# Altium PCB short_circuit_protection.PcbDoc
Units mm, origin at the board's own origin, x right, y up, seen from the top; angles counter-clockwise.
Board outline 77.72 x 84.84 mm, 2 copper layers (Top Layer, Bottom Layer); 11 components, 9 nets, 33 pads, 0 vias.
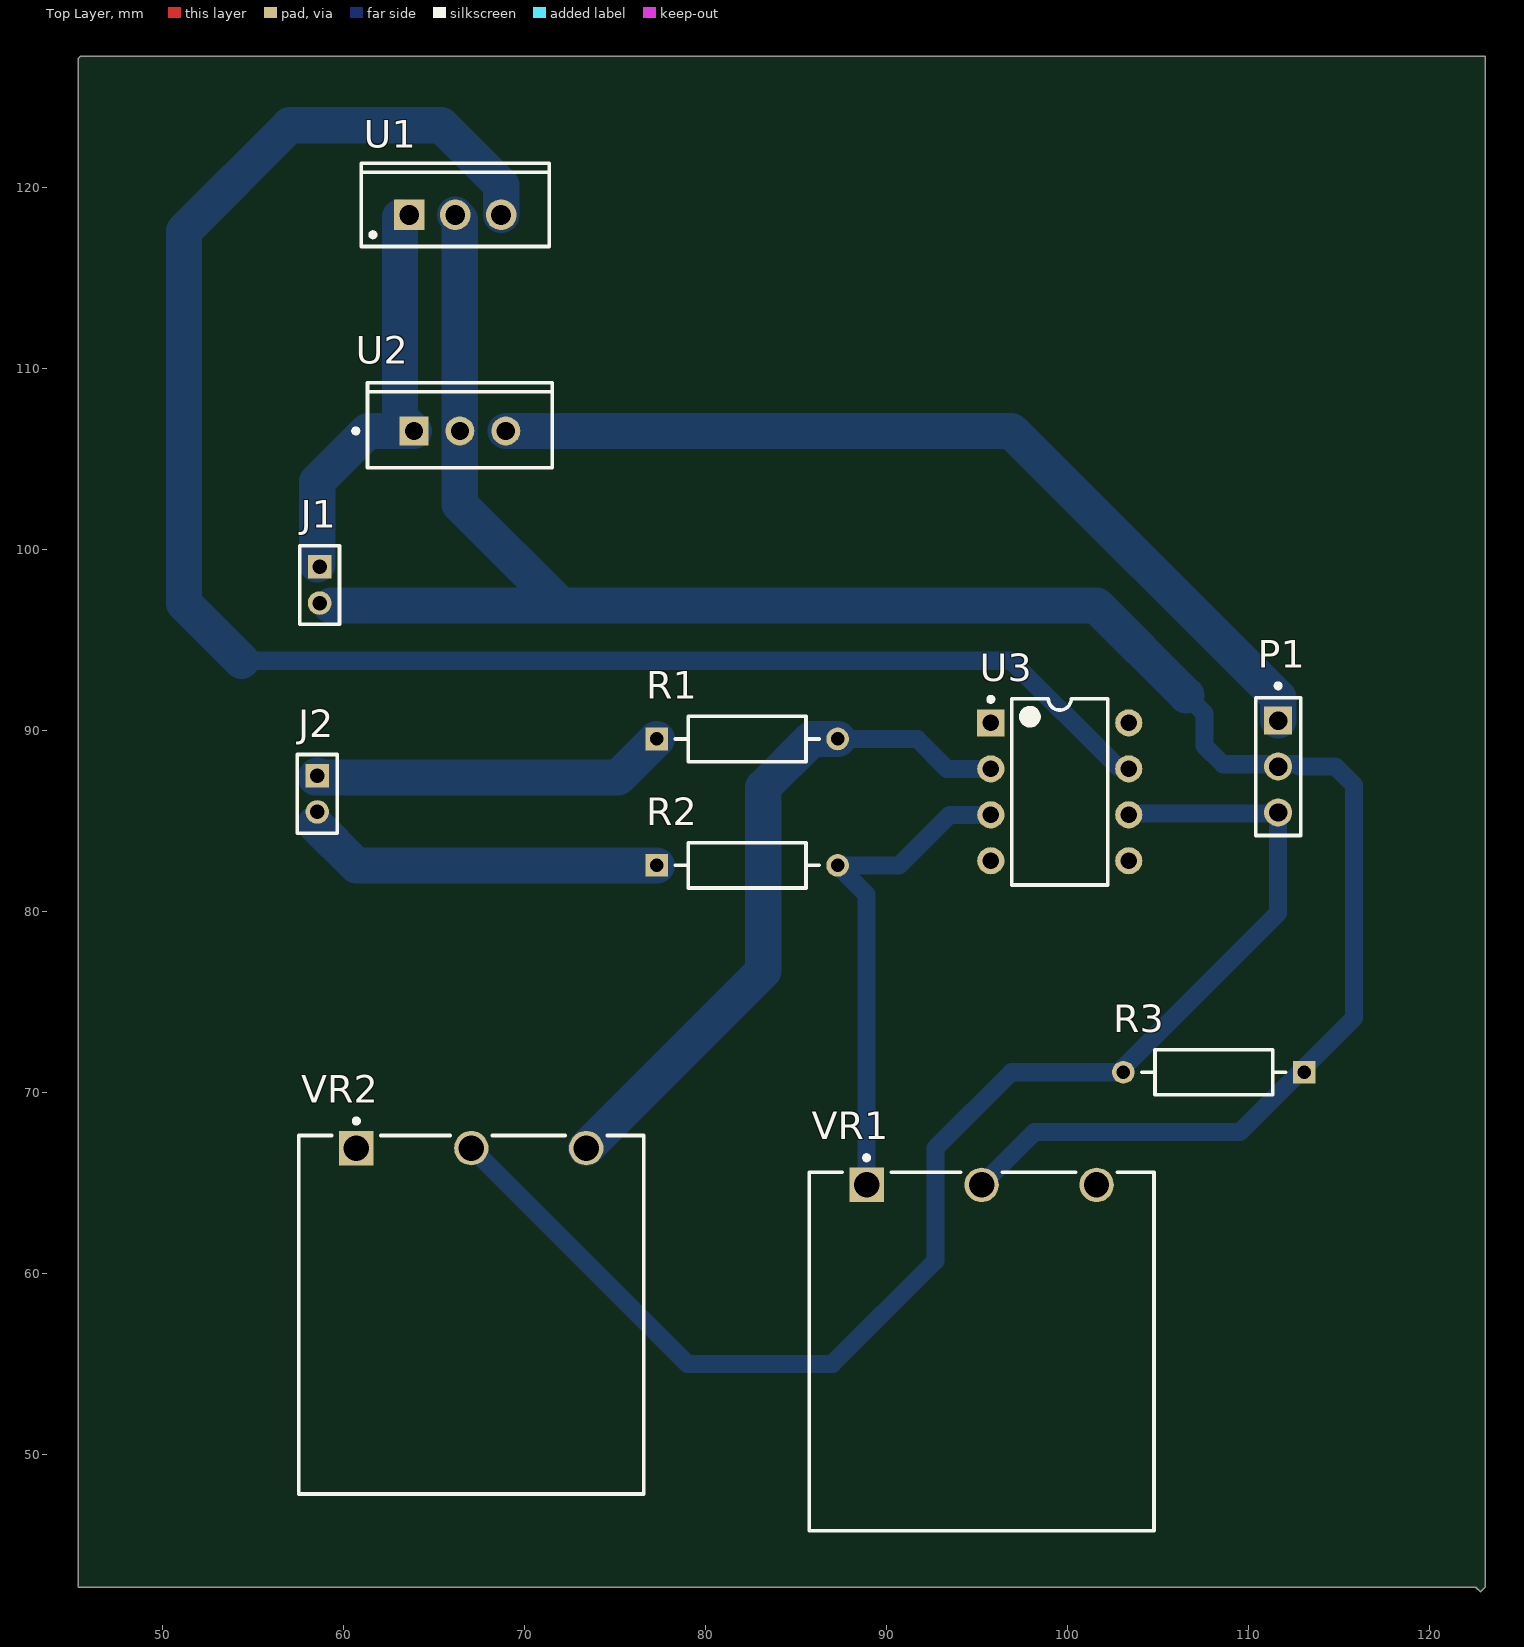
[diagram p0: Top Layer view]
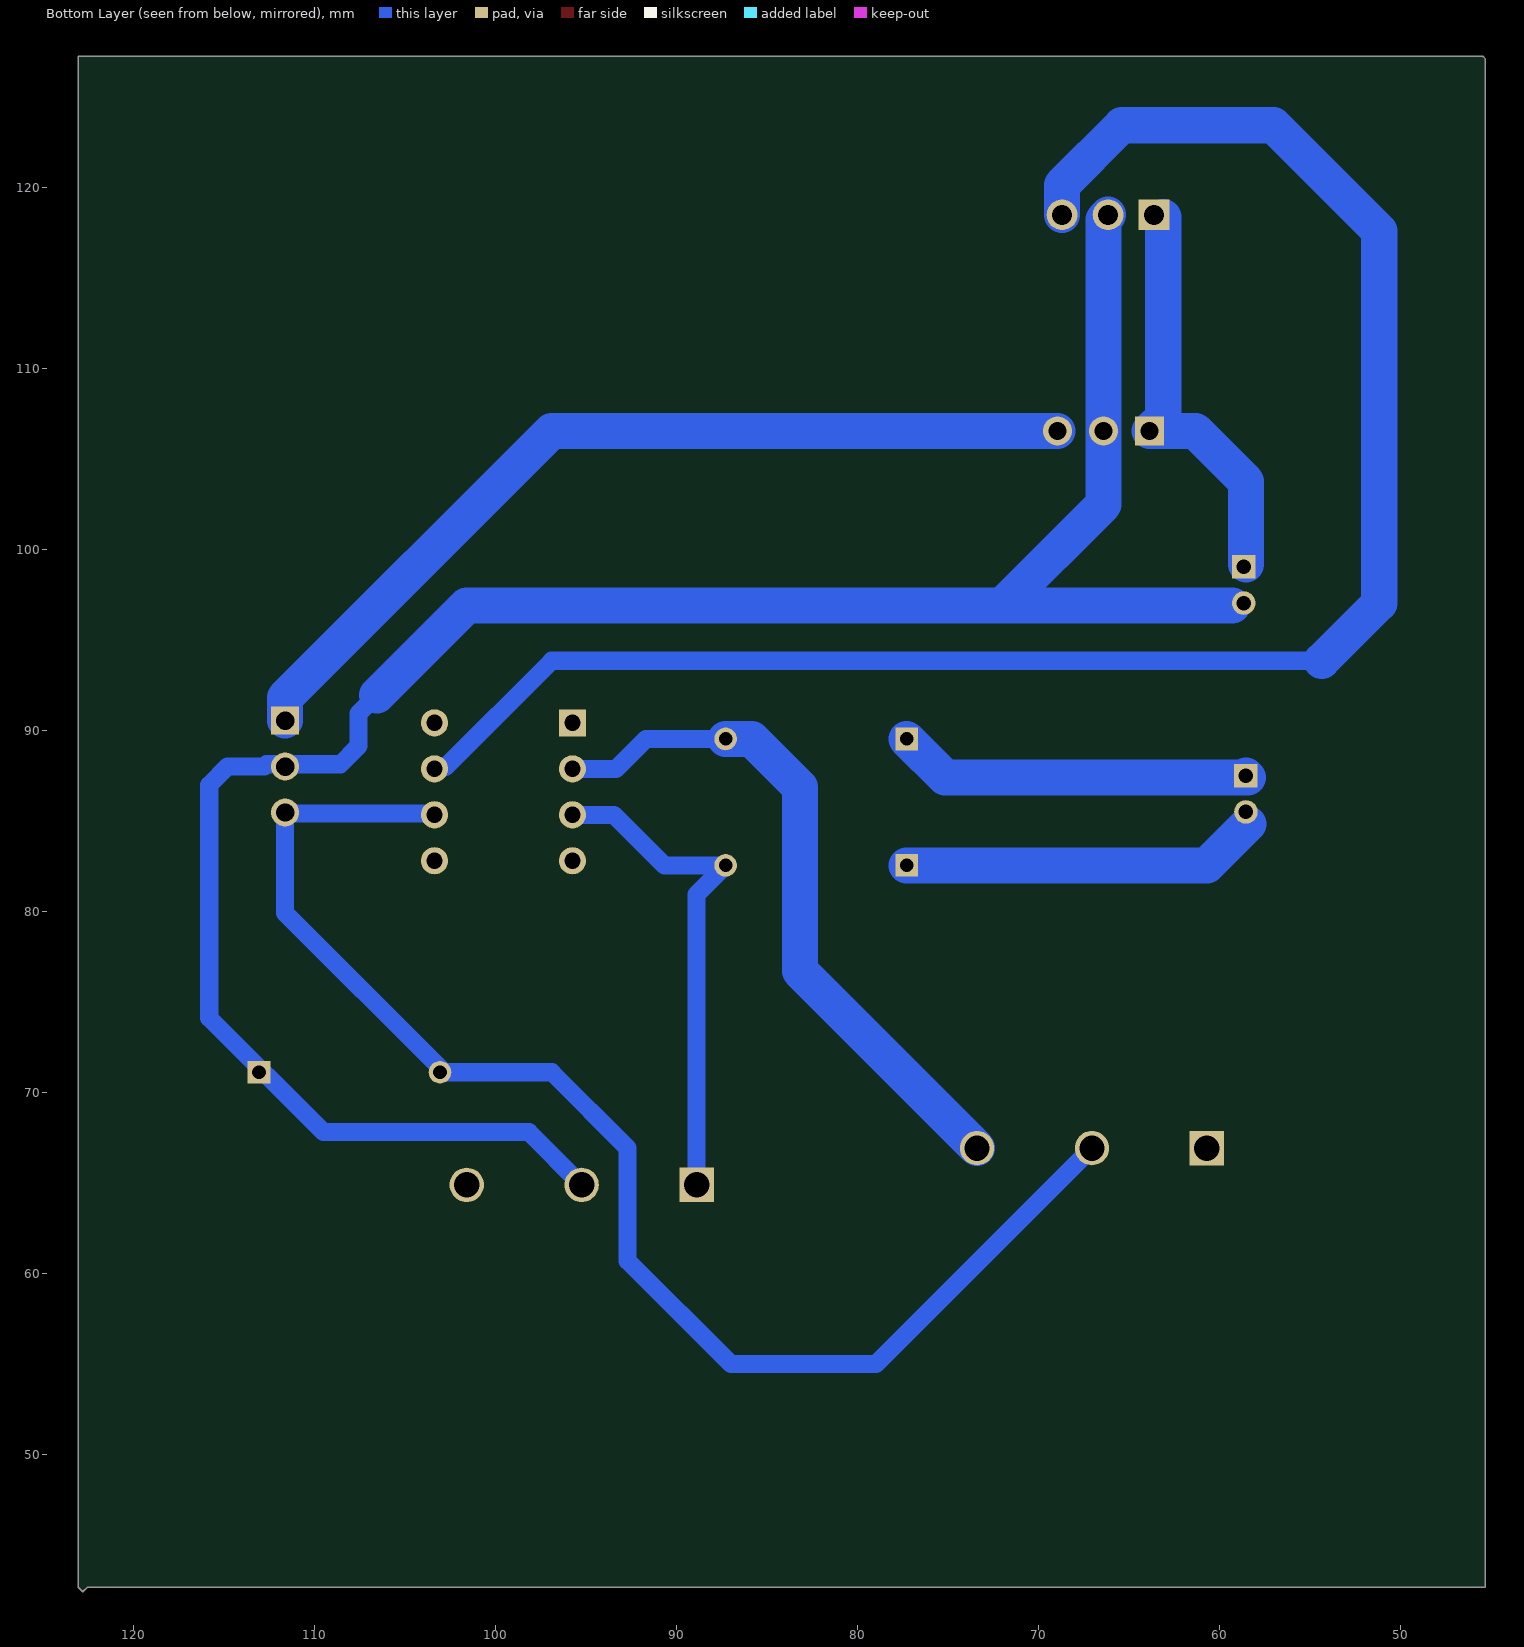
[diagram p1: Bottom Layer view, seen from below]
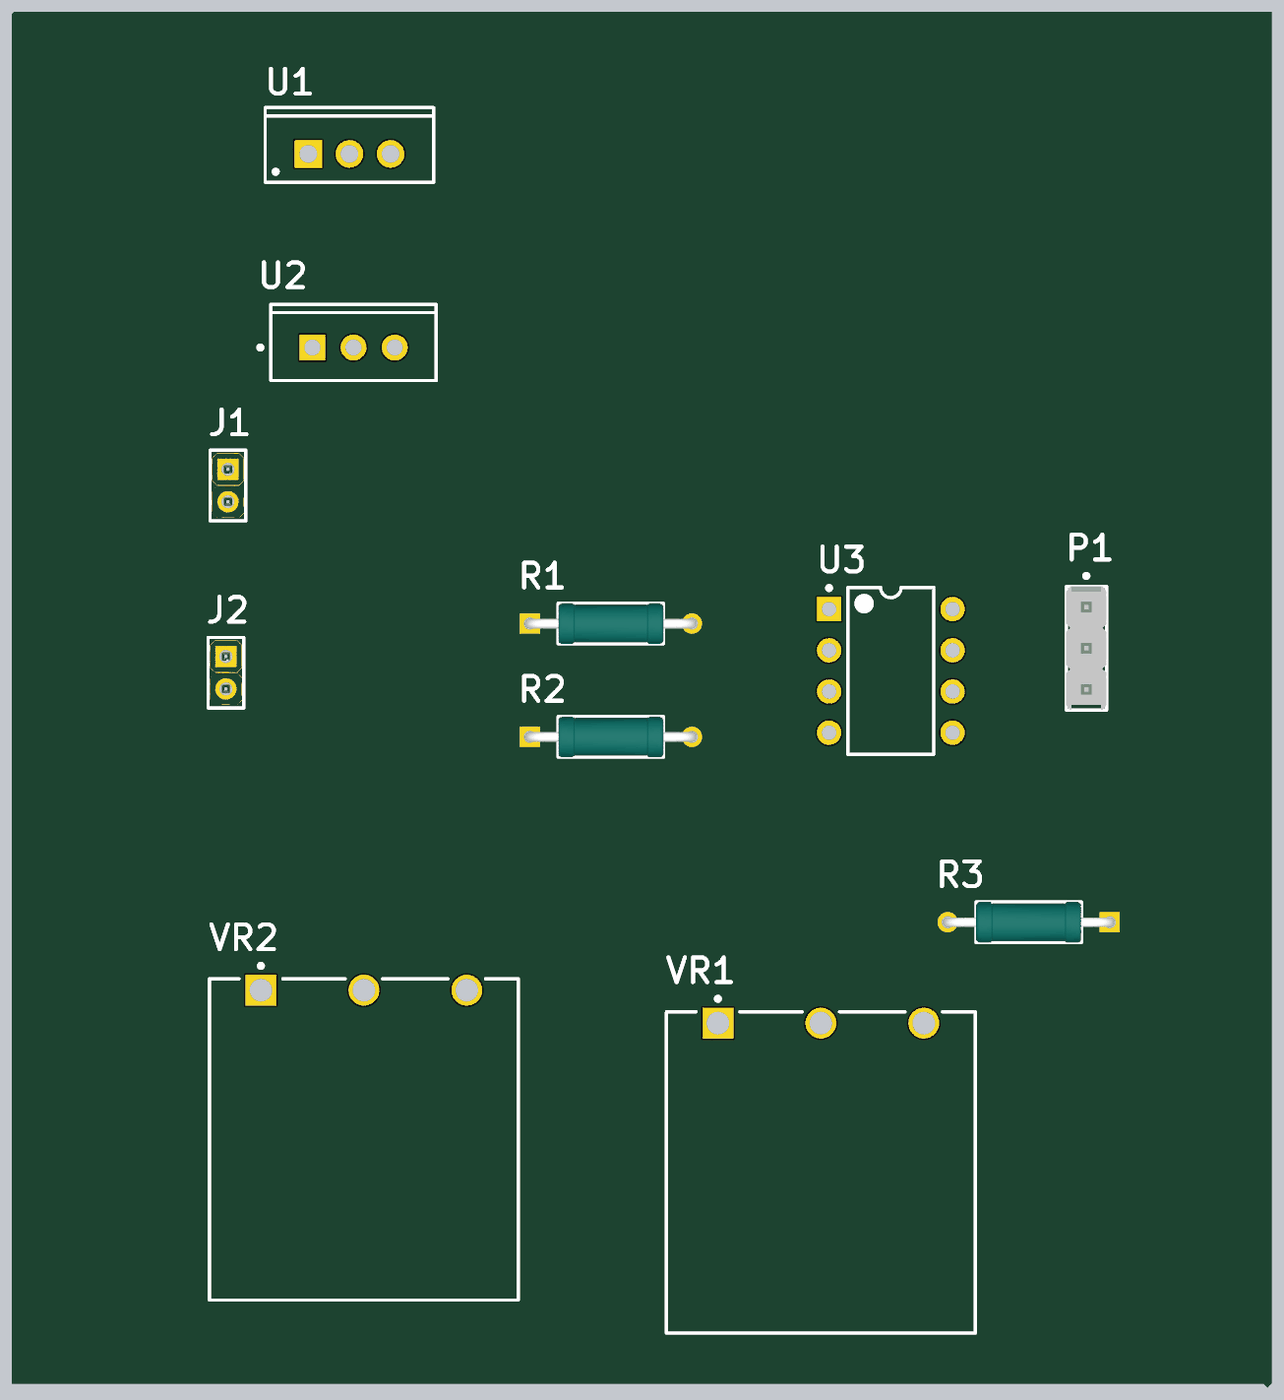
[diagram p2: 3D render of the assembled board from above, using the file's embedded part models]

## Layer stack, top to bottom
Top Solder: solder mask 0.0102, Solder Resist, Dk 3.5
Top Layer: signal copper 0.0356
Dielectric 1: dielectric 0.32, FR-4, Dk 4.8
Bottom Layer: signal copper 0.0356
Bottom Solder: solder mask 0.0102, Solder Resist, Dk 3.5

## Board outline
123.063,127.254 123.063,42.672 122.809,42.418 122.555,42.672 45.339,42.672 45.339,127.127 45.466,127.254

## Design rules (kind name [scope] priority, off if disabled: settings)
Clearance [All] p1: gap=0.254 ignorepadtopadclearanceinfootprint=FALSE except(0: Arc-Hole Track-Hole SMDPad-Hole THPad-Hole Via-Hole Fill-Hole Poly-Hole Region-Hole Text-Hole)
PolygonConnect [All] p1: connectstyle=Relief reliefconductorwidth=0.254 reliefentries=4 polygonreliefangle="90 Angle" airgapwidth=0.254
RoutingVias [All] p1: holewidth=0.711 width=1.27 viastyle="Through Hole" minholewidth=0.711 minwidth=1.27 maxholewidth=0.711 maxwidth=1.27
SolderMaskExpansion [All] p1: expansion=0.102 istentingtop=FALSE
Width [All] p1: maxlimit=2 minlimit=1 preferedwidth=1.2
30 further rules are at their usual default settings.

## Classes and differential pairs
component class short_circuit_protection: J1 P1 R1 R2 R3 U1 U2 U3 VR1 VR2

## Components (designator, comment, footprint, x,y, rotation, side; value= is the part's Value field where it differs from the comment)
J1 "M22-2510205" FP-M22-2510205-MFG 58.674,98.044 r270 top
J2 "M22-2510205" FP-M22-2510205-MFG 58.547,86.503 r270 top
P1 "22-28-4033" MOLX-22-28-4033_V 111.633,88.011 r270 top
R1 "MRS25000C1001FCT00" FP-MRS25-MFG 82.296,89.535 r0 top
R2 "MRS25000C1001FCT00" FP-MRS25-MFG 82.296,82.55 r0 top
R3 "MRS25000C1001FCT00" FP-MRS25-MFG 108.077,71.12 r180 top
U1 "L7809CV" TO220 66.167,118.491 r0 top
U2 "LM7805CT" FAIR-TO-220-3 66.421,106.553 r90 top
U3 "LM741J" NAB0008A 99.568,86.614 r0 top
VR1 "3852A-282-103AL" BOUR-3852A-282-103AL-3_V 95.25,64.897 r0 top
VR2 "3852A-282-103AL" BOUR-3852A-282-103AL-3_V 67.056,66.929 r0 top

## Footprints (in the part's own frame and the unit in brackets; to place one, negate y for a bottom-side part, rotate by r counter-clockwise, add the part's x,y. Pads: shape width x height; smd on the part's side, far side on the other; paste and mask are expansions set on the pad)
BOUR-3852A-282-103AL-3_V [mm] "TH, 3-Leads, Body 19.81x19.05mm, Pitch 6.35mm"
  rect 1.9x1.9 hole 1.4: 1(-6.35,0)
  round 1.9 hole 1.4: 2(0,0) 3(6.35,0)
  silkscreen extent -9.53,-19.11 9.53,1.62, body extent -9.52,-19.11 9.52,0.7, height 19.05
FAIR-TO-220-3 [mm] "FM, 3-Leads, Body 10.2x4.7mm, Pitch 2.54mm"
  rect 1.6x1.6 hole 1: 1(0,2.54)
  round 1.6 hole 1: 2(0,0) 3(0,-2.54)
  silkscreen extent -2.04,-5.1 2.66,5.87, body extent -2.04,-5.1 2.66,5.1, height 18.95
FP-M22-2510205-MFG [mm]
  rect 1.3x1.3 hole 0.8 paste-1000 mask+0: 1(-1,0)
  round 1.3 hole 0.8 paste-1000 mask+0: 2(1,0)
  silkscreen extent -2.17,-1.1 2.17,1.1, body extent -2.27,-1.2 2.27,1.2, height 0.25
FP-MRS25-MFG [mm]
  rect 1.25x1.25 hole 0.75 paste-1000 mask+0: 1(-5,0)
  round 1.25 hole 0.75 paste-1000 mask+0: 2(5,0)
  silkscreen extent -3.98,-1.25 3.98,1.25, body extent -5.72,-1.35 5.72,1.35, height 0.25
MOLX-22-28-4033_V [mm] "THD, 3-Leads, Body 7.62x2.49mm, Pitch 2.54mm"
  rect 1.55x1.55 hole 1.02: 1(-2.54,0)
  round 1.55 hole 1.02: 2(0,0) 3(2.54,0)
  silkscreen extent -4.58,-1.24 3.81,1.24, body extent -3.81,-1.24 3.81,1.24, height 8.38
NAB0008A [mm] "DIP, 8-Leads, Body 9.78x6.73mm, Pitch 2.54mm, Row Spacing 7.62mm"
  rect 1.5x1.5 hole 0.9: 1(-3.81,3.81)
  round 1.5 hole 0.9: 2(-3.81,1.27) 3(-3.81,-1.27) 4(-3.81,-3.81) 5(3.81,-3.81) 6(3.81,-1.27) 7(3.81,1.27) 8(3.81,3.81)
  silkscreen extent -3.93,-5.15 2.65,5.23, body extent -3.6,-5.15 3.6,5.15, height 5.08
TO220 [mm] "TO, Thru-Hole, Vertical, Heatsink Mounted; 3 In-Line Leads; Pitch 2.54 mm"
  rect 1.7x1.7 hole 1.1: 1(-2.54,0)
  round 1.7 hole 1.1: 2(0,0) 3(2.54,0)
  silkscreen extent -5.2,-1.75 5.2,2.85, body extent -5.25,-1.8 5.25,2.9, height 19.7

## Part data
J1 J2: library part CMP-15831-000005-1, "CONN HEADER VERT 2POS 2MM", Current Rating=2A, Manufacturer=Harwin, Package=0, Temperature="-40°C to +105°C", Temperature Range High=+105°C, Temperature Range Low=-40°C, Automotive=No, Category=Conn, ComponentLink2Description=Datasheet, ComponentLink2URL=https://cdn.harwin.com/pdfs/C018XX_M22_Series_Connectors.pdf, Conn Gender=Male, Conn Orientation=Vertical, Contact Material=Gold,Nickel, Device Class L1=Connectors, Device Class L2="Headers and Wire Housings", Device Class L3=unset, Digikey Description="CONN HEADER VERT 2POS 2MM", Footprint Url=https://cdn.harwin.com/pdfs/M22-251.pdf, Height=5.45mm, Lead Free=Yes, Manufacturer Part Number=M22-2510205, Mouser Description="Headers & Wire Housings 2 PIN SIL VERTICAL GOLD PIN HEADER", Number Of Contacts=2, Number Of Rows=1, Octopart=https://octopart.com/m22-2510205-harwin-2538221, Pitch=2mm, RoHS=TRUE
P1: library part CMP-1676-00001-5, "Male Header, Pitch 2.54 mm, 1 x 3 Position, Height 8.38 mm, Tail Length 3.18 mm, RoHS, Bulk", Colour=Black, Current Rating="4 A", Manufacturer=Molex, Max Operating Temperature="75 degC", Min Operating Temperature="0 degC", Package Quantity=1, Voltage Rating="250 V", ComponentLink1Description="Manufacturer URL", ComponentLink1URL=http://www.molex.com/, ComponentLink2Description=Datasheet, ComponentLink2URL=http://www.molex.com/pdm_docs/sd/022284033_sd.pdf, Contact Finish=Gold, Contact Material=Brass, Contact Plating=Gold, DatasheetVersion="Rev. G, 01/2012", Height="8.38 mm", Lead Pitch="0.1 inch", Length="7.62 mm", Mount="Through Hole", Mounting Technology="Through Hole", PackageDescription="Male Header, Pitch 2.54 mm, 1 x 3 Position, Height 8.38 mm, Tail Length 3.18 mm", PackageReference=22-28-4033, Packaging=Bulk, Pins=3, REACH SVHC=Unknown, RoHSCompliant=true, Rows=1
R1 R2 R3: library part CMP-02408-000051-1, "RES 1K OHM 0.6W 1% AXIAL", Case/Package=Axial, Max Operating Temperature=155°C, Max Power Dissipation=600mW, Min Operating Temperature=-55°C, Package Quantity=5000, Resistance=1kR, Resistance Tolerance=1%, Resistor Type="Metal Film", Temperature Coefficient=50ppm/°C, Voltage Rating=350V, Construction=Cylindrical, Contact Plating=Tin, Diameter=2.5mm, Lead Diameter=0.6mm, Lead Free="Lead Free", Length=6.5mm, Military Standard=Not, Mount="Through Hole", Number of Pins=2, Number of Terminations=2, Packaging="Tape and Reel", Power Rating=600mW, Radiation Hardening=No, RoHS Compliant=Yes, Series=MRS25, Technology="THIN FILM", Termination=Axial, Tolerance=1%, Voltage Rating (DC)=350V, Weight=0.00776oz, Width=2.5mm
U1: library part CMP-0244-00459-1, "Positive Voltage Regulator, 9V, 3-Pin TO-220", ComponentLink1Description="Manufacturer URL", ComponentLink1URL=http://www.st.com, ComponentLink2Description=Datasheet, ComponentLink2URL=http://www.st.com/internet/com/TECHNICAL_RESOURCES/TECHNICAL_LITERATURE/DATASHEET/CD00000444.pdf, ComponentLink3Description="Package Specification", ComponentLink3URL=http://www.st.com/internet/com/TECHNICAL_RESOURCES/TECHNICAL_LITERATURE/PACKAGE_INFORMATION/CD00004649.pdf, DatasheetVersion=16/11/2011, PackageDescription="TO, Thru-Hole, Vertical, Heatsink Mounted; 3 In-Line Leads; Pitch 2.54 mm", PackageReference=TO220, PackageVersion=ver3.0
U2: library part CMP-2000-04938-1, "Positive Voltage Regulator, 5 V, 1 A, -40 to 125 degC, 3-Pin TO-220, RoHS, Tube", Manufacturer=FairchildSemiconductor, Maximum Input Voltage=35V, Maximum Output Current=2.2(Typ)A, Maximum Quiescent Current=8mA, Operating Temperature=-40to125degC, Output Voltage=5V, Package=3TO-220AB, Package Description="3-Pin Through Hole Device, Body 10 x 4.5 mm, Pitch 2.54 mm", Package Reference=TO-220, Typical Dropout Voltage @ Current=2@1AV, Accuracy=±4%, Category=LinearRegulator, Datasheet URL=https://datasheet.ciiva.com/26904/lm7805ct-26904988.pdf, Datasheet Version=Aug-12, Line Regulation=100mV, Load Regulation=100mV, Manufacturer URL=https://www.fairchildsemi.com/, Mounting=ThroughHole, Number of Outputs=1, Output Type=Fixed, Package URL=https://www.fairchildsemi.com/package-drawings/TO/TO220B03.pdf, Packaging=Rail/Tube, Polarity=Positive, Rad Hard=No, Type=Linear
U3: library part CMP-0055-00160-3, "Operational Amplifier, 8-pin CerDIP", Manufacturer="Texas Instruments", Package Reference=NAB0008A, PackageTopMarking=NSUZXYTT*LM741J, PowerWise=N, ComponentLink1Description="Datasheet URL", ComponentLink1URL=http://www.ti.com/general/docs/lit/getliterature.tsp?genericPartNumber=LM741&fileType=pdf, CompType=Amplifiers, PackageDescription="Cerdip, .400 x .310in Body, 8 Lead, .300in Centers, .100in Pitch", PinCount=8, RoHS=N
VR1 VR2: library part CMP-2000-05079-1, "Diameter Panel Control, 10 KOhm, +/- 10%, 2 W, -1 to 125 degC, 3-Pin THD, RoHS, Bulk", Manufacturer=Bourns, Power (Watts)=2W, Resistance (Ohms)=10k, Resistive Material=Cermet, Standard Package=45, Temperature Coefficient=±150ppm/degC, Tolerance=±10%, Actuator Diameter="0.250\"(6.35mm)", Actuator Length="0.875\"(22.23mm)", Actuator Type=Slotted, Associated Product="36-8560-ND / -KNOBINSTRUMW/DIALRND.9\"DIA / 36-8555-ND / -KNOBINSTRUMSKIRTEDRND.7\"DIA / 36-8556-ND / -KNOBINSTRUMSKIRTEDRND.9\"DIA / 36-8565-ND / -KNOBINSTRUMDBLBARRND.7\"DIA / 36-8566-ND / -KNOBINSTRUMDBLBARRND.9\"DIA / 36-8568-ND / -KNOBINSTRUMSGLBARRND.7\"DIA / 36-8569-ND / -KNOBINSTRUMSGLBARRND.9\"DIA / 36-8559-ND / -KNOBINSTRUMW/DIALRND.7\"DIA / 226-1006-ND / -KNOBBLKGLOSS.75\"DIA.250\"SHAFT / 226-1007-ND / -KNOBBLKGLOSS.925\"DIA.250\"SHAFT / 226-1011-ND / -KNOBBLKGLOS", Built in Switch=None, Bushing Thread=3/8-32, Catalog Drawings="3852SeriesSide1 /  / 3852SeriesSide2", Category=Potentiometers,VariableResistors, Datasheet URL=https://datasheet.ciiva.com/11831/0900766b80f93b4b-11831016.pdf, Datasheet Version=Sep-14, Family=RotaryPotentiometers,Rheostats, Manufacturer URL=http://www.bourns.com/, Mounting Type=PanelMount, Number of Gangs=1, Number of Turns=1, Online Catalog=3852and3856Series, Other Names=3852A282103AL, Packaging=Bulk, PCN Design/Specification=PBTResinJun/2011, PCN Other=MultipleChanges01/Dec/2012, RoHS Information=3852A-LMaterialDeclaration, Rotation=280deg, Series=3852, Taper=Linear, Termination Style=SolderLug

## Nets (pads, with @x,y where several pads share a name; then routed paths per layer and width w, separated by ;. In a path a pad name is that pad's centre, name@x,y a point inside that pad or via, vN(x,y) a via of type N, cw(c..) or ccw(c..) an arc to the next point about the centre after c; other vN are vias at no path point)
GND: J1.2 P1.2 R3.1 U1.2 U2.2 VR1.2 | length 122.9
  Bottom Layer w1: VR1.2 98.171,67.818 109.521,67.818 115.824,74.121 115.824,86.995 114.808,88.011 112.776,88.011 112.649,88.138 108.585,88.138 107.569,89.154 107.569,90.932 106.553,91.948
  Bottom Layer w2: 59.309,96.901 72.009,96.901 ; U1.2 66.421,118.237 U2.2 66.421,102.489 72.009,96.901 ; 106.553,91.948 101.6,96.901 72.009,96.901
NetJ2_1: J2.1 R1.1 | length 19.9
  Bottom Layer w2: J2.1 58.451,87.407 75.168,87.407 R1.1
NetJ2_2: J2.2 R2.1 | length 19.8
  Bottom Layer w2: 58.42,84.836 60.706,82.55 R2.1
NetP1_1: P1.1 U2.3 | length 50
  Bottom Layer w2: U2.3 96.901,106.553 111.633,91.821 P1.1
NetP1_3: P1.3 R3.2 U3.6 VR2.2 | length 77.4
  Bottom Layer w1: VR2.2 78.994,54.991 86.995,54.991 92.71,60.706 92.71,66.929 96.901,71.12 R3.2 ; R3.2@102.95,71.247 111.633,79.93 P1.3 111.569,85.407 103.441,85.407 U3.6
NetR1_2: R1.2 U3.2 VR2.3 | length 38.4
  Bottom Layer w1: R1.2 91.694,89.535 93.345,87.884 U3.2
  Bottom Layer w2: VR2.3 83.185,76.708 83.185,86.868 85.852,89.535 R1.2
NetR2_2: R2.2 U3.3 VR1.1 | length 27.9
  Bottom Layer w1: VR1.1 88.9,80.946 R2.2 90.678,82.55 93.472,85.344 U3.3
NetU1_3: U1.3 U3.7 | length 99.5
  Bottom Layer w1: 54.356,93.853 96.901,93.853 102.774,87.98 103.282,87.98 U3.7
  Bottom Layer w2: 54.356,93.853 51.181,97.028 51.181,117.602 57.023,123.444 65.405,123.444 68.707,120.142 U1.3
power: J1.1 U1.1 U2.1 | length 23.4
  Bottom Layer w1: J1.1@58.547,99.187 58.547,99.171 J1.1
  Bottom Layer w2: J1.1@58.547,99.187 58.547,103.759 61.341,106.553 U2.1 63.119,107.315 U1.1@63.119,118.364
pads on no net: U3.1 U3.4 U3.5 U3.8 VR1.3 VR2.1